# Altium PCB FLYBACK_SWITCHING_POWER_SUPPLY.PcbDoc
Units mm, origin at the board's own origin, x right, y up, seen from the top; angles counter-clockwise.
Board outline 79.25 x 45.72 mm, 2 copper layers (Top Layer, Bottom Layer); 33 components, 21 nets, 76 pads, 2 vias.
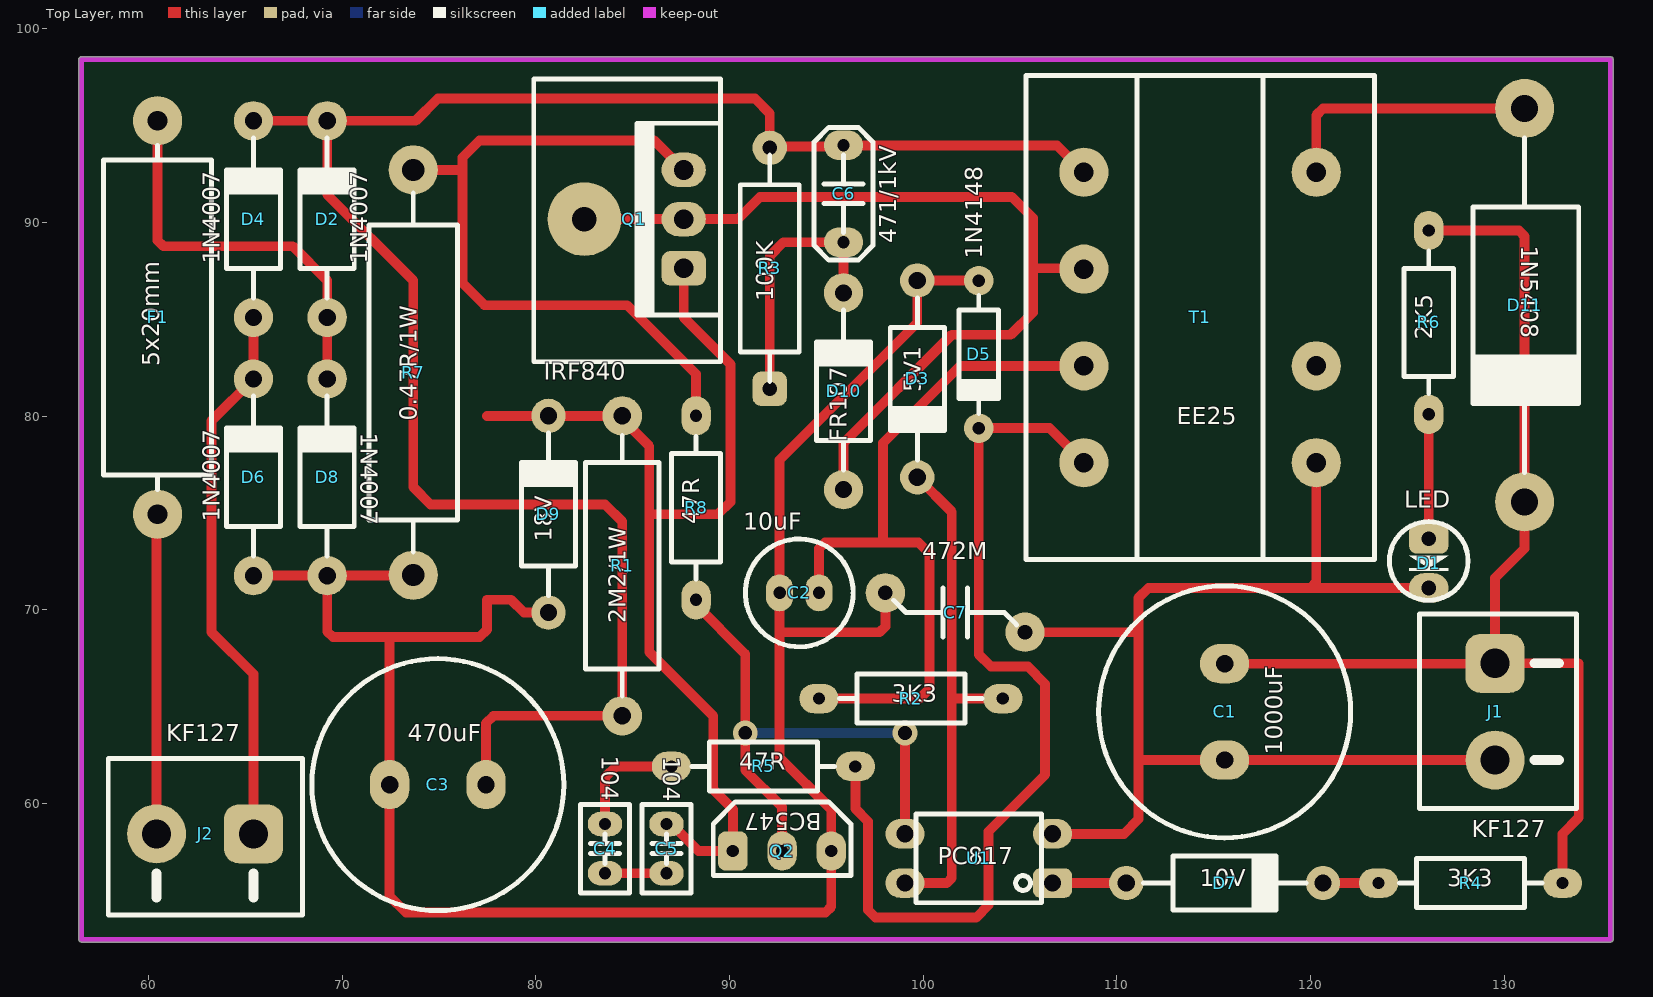
[diagram p0: Top Layer view]
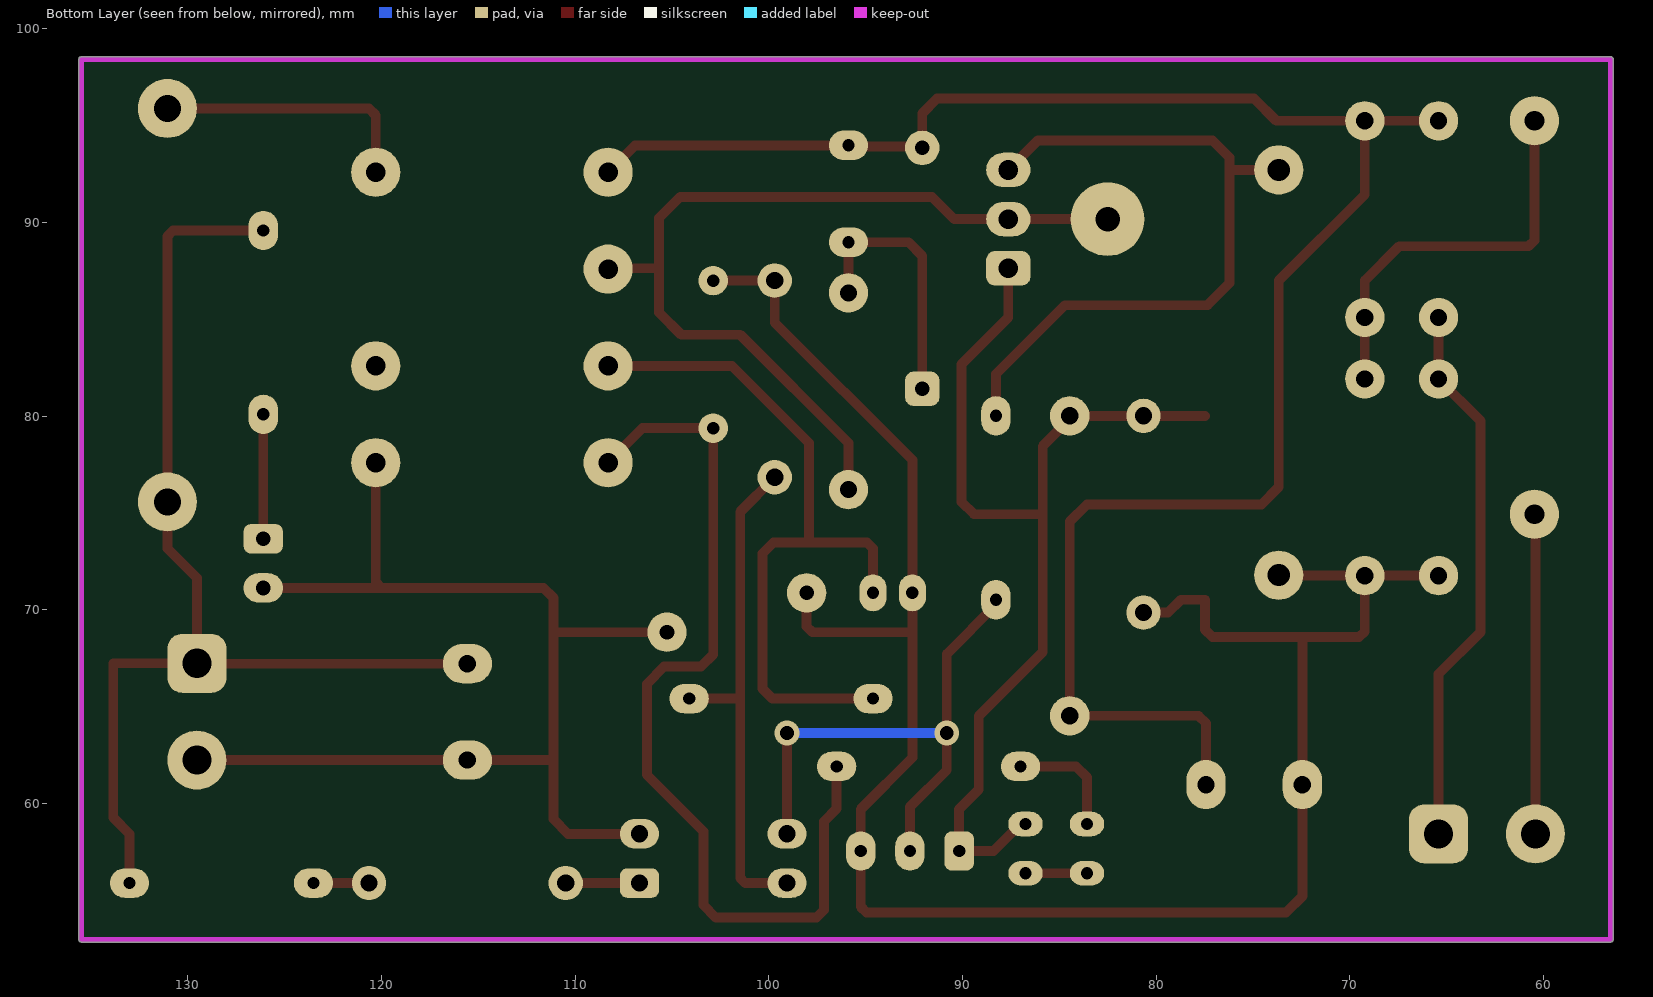
[diagram p1: Bottom Layer view, seen from below]
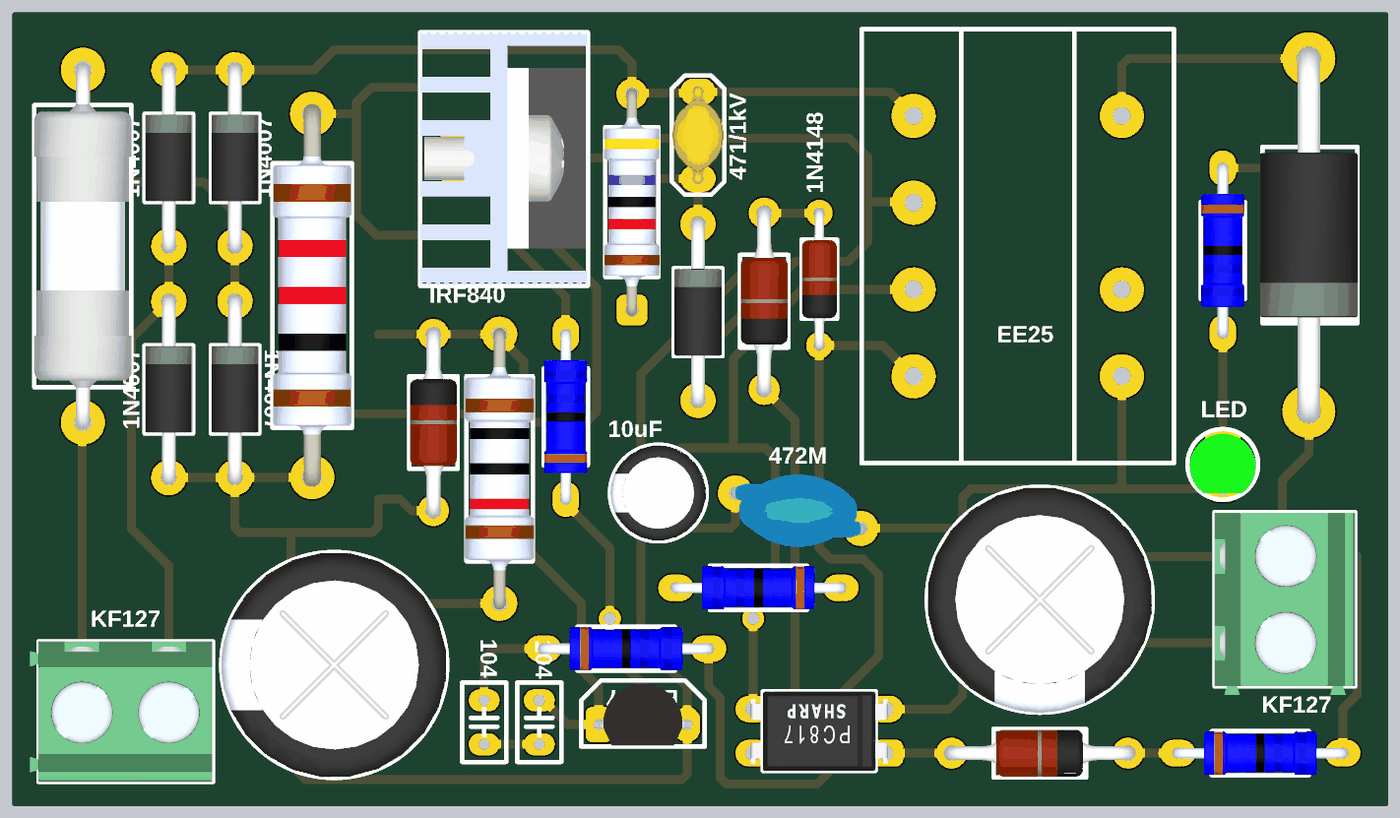
[diagram p2: 3D render of the assembled board from above, using the file's embedded part models]

## Layer stack, top to bottom
Top Solder: solder mask 0.0102, Solder Resist, Dk 3.5
Top Layer: signal copper 0.0356
Dielectric 1: dielectric 0.32, FR-4, Dk 4.8
Bottom Layer: signal copper 0.0356
Bottom Solder: solder mask 0.0102, Solder Resist, Dk 3.5

## Board outline
56.388,52.959 56.388,98.425 cw(c56.515,98.425) 56.515,98.552 135.509,98.552 cw(c135.509,98.425) 135.636,98.425 135.636,52.959 cw(c135.509,52.959) 135.509,52.832 56.515,52.832 cw(c56.515,52.959)

## Design rules (kind name [scope] priority, off if disabled: settings)
Clearance [All] p1: gap=0.254 ignorepadtopadclearanceinfootprint=FALSE except(0: Arc-Hole Track-Hole SMDPad-Hole THPad-Hole Via-Hole Fill-Hole Poly-Hole Region-Hole Text-Hole)
PolygonConnect [All] p1: connectstyle=Relief reliefconductorwidth=0.254 reliefentries=4 polygonreliefangle="90 Angle" airgapwidth=0.254
RoomDefinition FLYBACK_SWITCHING_POWER_SUPPLY [InComponentClass('FLYBACK_SWITCHING_POWER_SUPPLY')] p1: confinementstyle=ConfineIn formatcopy=TRUE lockcomponents=FALSE outline 0,0 50.8,0 50.8,25.4 0,25.4
RoutingVias [All] p1: holewidth=0.711 width=1.27 viastyle="Through Hole" minholewidth=0.711 minwidth=1.27 maxholewidth=0.711 maxwidth=1.27
SolderMaskExpansion [All] p1: expansion=0.102 istentingtop=FALSE
Width [All] p1: maxlimit=1.27 minlimit=0.254 preferedwidth=0.508
30 further rules are at their usual default settings.

## Components (designator, comment, footprint, x,y, rotation, side; value= is the part's Value field where it differs from the comment)
C1 "1000uF" CAP_RAD_D12.5x15 115.57,64.719 r270 top
C2 "10uF" CAP_RAD_D05x11 93.599,70.866 r180 top
C3 "470uF" CAP_RAD_D12.5x15 74.93,60.96 r180 top
C4 "104" CAP_Ceramic_2.5MM 83.566,57.658 r90 top
C5 "104" CAP_Ceramic_2.5MM 86.741,57.658 r270 top
C6 "471/1kV" CAP_Ceramic_5MM 95.885,91.48 r90 top
C7 "472M" CAP_Ceramic_472M_7.21MM 101.651,69.85 r0 top
D1 "LED" LED_3MM_GREEN 126.111,72.517 r270 top
D2 "1N4007" DO-204AL-BK 69.215,90.17 r90 top
D3 "5V1" DO-204AL-RD 99.695,81.915 r270 top
D4 "1N4007" DO-204AL-BK 65.405,90.17 r90 top
D5 "1N4148" DO-204AH-RD 102.87,83.185 r270 top
D6 "1N4007" DO-204AL-BK 65.405,76.835 r90 top
D7 "10V" DO-204AL-RD 115.57,55.88 r0 top
D8 "1N4007" DO-204AL-BK 69.215,76.835 r90 top
D9 "18V" DO-204AL-RD 80.645,74.93 r90 top
D10 "FR107" DO-204AL-BK 95.885,81.28 r90 top
D11 "1N5408" DO-201AD-BK 131.064,85.725 r270 top
F1 "5x20mm" FUSE_Bel_MJS 60.452,85.09 r90 top
J1 "KF127" DG127-5.0-02P-14-00AH 129.54,67.23 r270 top
J2 "KF127" DG127-5.0-02P-14-00AH 65.405,58.42 r180 top
Q1 "IRF840" TO-220-HEAT-SINK-1 87.63,90.17 r90 top
Q2 "BC547" TO-92 92.71,57.531 r0 top
R1 "2M2/1W" RES-1W-H 84.455,72.263 r270 top
R2 "3K3" RES-0.25W-H 99.365,65.405 r180 top
R3 "100K" RES-0.5W-H 92.075,87.63 r90 top
R4 "3K3" RES-0.25W-H 128.27,55.88 r0 top
R5 "47R" RES-0.25W-H 91.745,61.9 r0 top
R6 "2K5" RES-0.25W-H 126.111,84.836 r270 top
R7 "0.47R/1W" RES-2W-H 73.66,82.245 r90 top
R8 "47R" RES-0.25W-H 88.265,75.26 r90 top
T1 "EE25" TRANSFORMER-FLUOLAMP-8W 114.3,85.09 r270 top
U1 "PC817" PC817-DIP 102.87,57.15 r180 top

## Footprints (in the part's own frame and the unit in brackets; to place one, negate y for a bottom-side part, rotate by r counter-clockwise, add the part's x,y. Pads: shape width x height; smd on the part's side, far side on the other; paste and mask are expansions set on the pad)
CAP_Ceramic_2.5MM [mil]
  oval 50x70 hole 25: 1(-50,0) 2(50,0)
  silkscreen extent -90,-50 90,50, body extent -92,-49 92,49, height 289
CAP_Ceramic_5MM [mil]
  oval 60x80 hole 25: 1(-98.43,0) 2(98.43,0)
  silkscreen extent -135,-60 135,60, body extent -110,-59 110,59, height 216
CAP_Ceramic_472M_7.21MM [mil]
  round 80 hole 30: 1(-142,40) 2(142,-40)
  silkscreen extent -125,-50 125,50, body extent -154,-83 154,83, height 319
CAP_RAD_D05x11 [mil]
  oval 55x75 hole 25: 1(-40,0) 2(40,0)
  silkscreen extent -110,-110 110,110, body extent -108,-108 108,108, height 492
CAP_RAD_D12.5x15 [mil]
  oval 80x100 hole 35: 1(-98,0) 2(98,0)
  silkscreen extent -256,-256 256,256, body extent -256,-256 256,256, height 650
DG127-5.0-02P-14-00AH [mil]
  rrect50% 120x120 hole 59.06: 1(0,0)
  round 120 hole 59.06: 2(196.85,0)
  silkscreen extent -100,-154 295,165, body extent -98,-154 315,165, height 398
DO-201AD-BK [mil]
  round 120 hole 55: 1(-400,0) 2(400,0)
  silkscreen extent -340,-105 340,110, body extent -425,-110 426,110, height 224
DO-204AH-RD [mil]
  round 60 hole 25: 1(-150,0) 2(150,0)
  silkscreen extent -120,-40 120,40, body extent -161,-39 161,39, height 82
DO-204AL-BK [mil]
  round 80 hole 35: 1(-200,0) 2(200,0)
  silkscreen extent -160,-55 165,55, body extent -216,-53 216,53, height 110
DO-204AL-RD [mil]
  round 70 hole 35: 1(-200,0) 2(200,0)
  silkscreen extent -165,-55 165,55, body extent -216,-53 216,53, height 110
FUSE_Bel_MJS [mil]
  round 100 hole 40: 1(-400,0) 2(400,0)
  silkscreen extent -350,-110 350,110, body extent -416,-110 416,110, height 229
LED_3MM_GREEN [mil]
  rrect50% 60x80 hole 30: 1(-45,0)
  oval 60x80 hole 30: 2(55,0)
  silkscreen extent -80,-80 80,80, body extent -70,-75 65,75, height 223
PC817-DIP [mil]
  rrect50% 80x60 hole 35: 1(-150,50)
  oval 80x60 hole 35: 2(-150,-50) 3(150,-50) 4(150,50)
  silkscreen extent -128,-90 128,90, body extent -155,-90 155,90, height 169
RES-0.5W-H [mil]
  rrect50% 70x70 hole 30: 1(-245,0)
  round 70 hole 30: 2(245,0)
  silkscreen extent -230,-60 230,60, body extent -258,-63 258,63, height 143
RES-0.25W-H [mil]
  oval 80x60 hole 25: 1(-187,0) 2(187,0)
  silkscreen extent -145,-50 145,50, body extent -199,-49 199,49, height 109
RES-1W-H [mil]
  round 80 hole 35: 1(-305,0) 2(305,0)
  silkscreen extent -265,-75 265,75, body extent -319,-79 319,79, height 179
RES-2W-H [mil]
  round 100 hole 45: 1(-412,0) 2(412,0)
  silkscreen extent -365,-90 365,90, body extent -433,-89 433,89, height 194
TO-92 [mil]
  rrect50% 60x80 hole 25: 1(-100,0)
  oval 60x80 hole 25: 2(0,0) 3(100,0)
  silkscreen extent -140,-50 140,100, body extent -109,-48 109,93, height 298
TO-220-HEAT-SINK-1 [mil]
  rrect50% 70x90 hole 40: 1(-100,0)
  round 150 hole 50: 2(0,202)
  oval 70x90 hole 40: 2(0,0) 3(100,0)
  silkscreen extent -290,-75 285,305, body extent -288,-74 286,304, height 791
TRANSFORMER-FLUOLAMP-8W [mm]
  round 2.54 hole 1.016: 1(-7.5,-6) 2(-2.5,-6) 3(2.5,-6) 4(7.5,-6) 5(7.5,6) 6(2.5,6) 7(-7.5,6)
  silkscreen extent -12.5,-9 12.5,9

## Part data
C1 C2 C3: library part Capacitor(Radian)
C4 C5 C6 C7: library part Capacitors(Disc)
D1: library part "LED 3MM"
D2 D4 D6 D8: library part Diode-1N4007
D3 D7 D9: library part Diode-Zener
D5: library part Diode-1N4148
D10: library part Diode-FR107, "1A 1000V"
D11: library part Diode-1N5401
F1: library part Fuse-5x20mm
J1 J2: library part DG127-5.0-02P-14-00AH
Q1: library part Mosfet-IRF840
Q2: library part Transistor-BC547, "VCEO: 45 Vdc / VCBO: 50 Vdc / VEBO: 6.0 Vdc"
R1 R2 R3 R4 R5 R6 R7 R8: library part "Resistors THD"
T1: library part TRANS-FLUOLAMP-V0
U1: library part Opto-PC817

## Via types
v1: diameter 1.27, hole 0.711, Top Layer to Bottom Layer, 2 vias

## Nets (pads, with @x,y where several pads share a name; then routed paths per layer and width w, separated by ;. In a path a pad name is that pad's centre, name@x,y a point inside that pad or via, vN(x,y) a via of type N, cw(c..) or ccw(c..) an arc to the next point about the centre after c; other vN are vias at no path point)
GND: C2.2 C3.2 C7.1 D3.1 D5.1 D6.1 D8.1 D9.1 Q2.3 R7.1 | length 107.7
  Top Layer w0.508: D6.1 D8.1 ; R7.1 73.647,71.768 69.228,71.768 D8.1 ; D9.1 79.375,69.85 78.715,70.51 77.47,70.51 77.47,68.961 77.089,68.58 72.441,68.58 ; C7.1 98.044,69.132 97.746,68.834 92.583,68.834 ; D3.1 99.695,84.836 92.583,77.724 C2.2 92.583,68.834 ; D3.1@100.203,86.995 D5.1 ; D8.1 69.215,68.878 69.513,68.58 72.441,68.58 ; 72.441,68.58 C3.2 72.441,55.194 73.279,54.356 94.952,54.356 95.25,54.654 Q2.3 95.25,59.69 92.583,62.357 92.583,68.834
NetC1_1: C1.1 D11.2 J1.1 R4.2 R6.1 | length 57.8
  Top Layer w0.508: C1.1 129.518,67.208 J1.1 ; R6.1 130.766,89.586 131.064,89.288 D11.2 131.064,73.152 129.54,71.628 J1.1 ; R4.2 133.02,58.42 133.858,59.258 133.858,67.23 J1.1
NetC1_2: C1.2 C7.2 D1.2 J1.2 T1.5 U1.2 | length 62.3
  Top Layer w0.508: C7.2 111.125,68.834 ; U1.2 110.363,58.42 111.125,59.182 111.125,62.23 ; T1.5 120.3,71.418 120.002,71.12 ; D1.2 120.002,71.12 ; J1.2 C1.2 111.125,62.23 ; 111.125,62.23 111.125,68.834 ; 111.125,68.834 111.125,70.612 111.633,71.12 120.002,71.12
NetC2_1: C2.1 R2.2 T1.3 | length 38.5
  Top Layer w0.508: R2.2 99.822,65.405 100.33,65.913 100.33,72.898 99.758,73.469 97.917,73.469 ; C2.1 94.615,73.152 94.932,73.469 97.917,73.469 ; T1.3 101.894,82.59 97.917,78.613 97.917,73.469
NetC3_1: C3.1 C6.2 D2.2 D4.2 R1.2 R3.2 T1.1 | length 98.8
  Top Layer w0.508: D4.2 D2.2 ; C3.1 77.419,64.135 77.8,64.516 R1.2 84.455,74.549 83.566,75.438 74.549,75.438 73.66,76.327 73.66,86.995 69.215,91.44 D2.2 ; T1.1 106.91,93.98 C6.2 95.822,93.916 92.138,93.916 R3.2 92.075,95.631 91.313,96.393 74.93,96.393 73.787,95.25 D2.2
NetC4_1: C4.1 C5.2 | length 3.2
  Top Layer w0.508: C4.1 C5.2
NetC4_2: C4.2 R5.1 | length 6.1
  Top Layer w0.508: C4.2 83.566,61.341 84.125,61.9 R5.1
NetC5_1: C5.1 D9.2 Q1.1 Q2.1 R1.1 | length 53.3
  Top Layer w0.508: 77.47,80.01 D9.2 84.284,80.01 85.852,78.442 85.852,74.93 ; C5.1 86.995,58.928 88.392,57.531 Q2.1 90.17,59.69 89.154,60.706 89.154,64.516 85.852,67.818 85.852,74.93 ; Q1.1 87.63,85.09 90.043,82.677 90.043,75.565 89.408,74.93 85.852,74.93
NetC6_1: C6.1 D10.2 R3.1 | length 13.6
  Top Layer w0.508: R3.1 92.075,88.265 92.79,88.98 C6.1 D10.2
NetD1_1: D1.1 R6.2 | length 6.4
  Top Layer w0.508: D1.1 R6.2
NetD2_1: D2.1 D8.2 F1.2 | length 20.9
  Top Layer w0.508: F1.2 60.452,89.071 60.75,88.773 67.437,88.773 69.215,86.995 D2.1 D8.2
NetD3_2: D3.2 R2.1 U1.4 | length 26.6
  Top Layer w0.508: U1.4 101.219,55.88 101.473,56.134 101.473,65.405 ; D3.2 101.473,75.057 101.473,65.405 ; R2.1 101.473,65.405
NetD4_1: D4.1 D6.2 J2.1 | length 27.9
  Top Layer w0.508: J2.1@65.325,59.055 65.405,59.135 65.405,66.675 63.246,68.834 63.246,79.756 D6.2 D4.1
NetD5_2: D5.2 R5.2 T1.4 | length 48.9
  Top Layer w0.508: R5.2 96.495,59.715 97.155,59.055 97.155,54.483 97.536,54.102 102.743,54.102 103.378,54.737 103.378,58.547 106.299,61.468 106.299,66.167 105.41,67.056 103.505,67.056 102.87,67.691 D5.2 106.515,79.375 T1.4
NetD7_1: D7.1 U1.1 | length 3.8
  Top Layer w0.508: U1.1 D7.1
NetD7_2: D7.2 R4.1 | length 2.9
  Top Layer w0.508: D7.2 R4.1
NetD10_1: D10.1 Q1.2 T1.2 | length 46.6
  Top Layer w0.508: Q1.2@82.499,90.17 87.63,90.17 90.424,90.17 91.567,91.313 104.577,91.313 105.664,90.226 105.664,87.63 ; D10.1 95.885,78.613 101.473,84.201 104.521,84.201 105.664,85.344 105.664,87.63 ; T1.2 108.26,87.63 105.664,87.63
NetD11_1: D11.1 T1.7 | length 13.9
  Top Layer w0.508: T1.7@120.304,92.587 T1.7 120.3,95.535 120.65,95.885 D11.1
NetF1_1: F1.1 J2.2 | length 15.6
  Top Layer w0.508: J2.2 F1.1@60.405,74.041
NetQ1_3: Q1.3 R7.2 R8.2 | length 37.6
  Top Layer w0.508: R7.2 76.207,92.71 ; Q1.3 86.106,94.234 77.089,94.234 76.207,93.352 76.207,92.71 ; R8.2 88.265,82.169 84.709,85.725 77.343,85.725 76.2,86.868 76.2,91.618 76.207,91.625 76.207,92.71
NetQ2_2: Q2.2 R8.1 U1.3 | length 28.3
  Top Layer w0.508: R8.1 88.265,70.256 90.805,67.716 v1(90.805,63.627) 90.805,61.722 92.71,59.817 Q2.2 ; U1.3 v1(99.06,63.627)
  Bottom Layer w0.508: v1(90.805,63.627) v1(99.06,63.627)
pads on no net: T1.6

## Keep-outs
Keep-Out Layer:
  lines w0.254: 56.515,52.959 56.515,98.425 135.509,98.425 135.509,52.959 56.515,52.959